# Altium PCB uMultimeter_ExpDigiPower_Pcb.PcbDoc
Units mil, origin at the board's own origin, x right, y up, seen from the top; angles counter-clockwise.
Board outline 950 x 1560 mil, 2 copper layers (Top Layer, Bottom Layer); 17 components, 21 nets, 66 pads, 10 vias.
Unrouted connection lines stored in the file: 2.
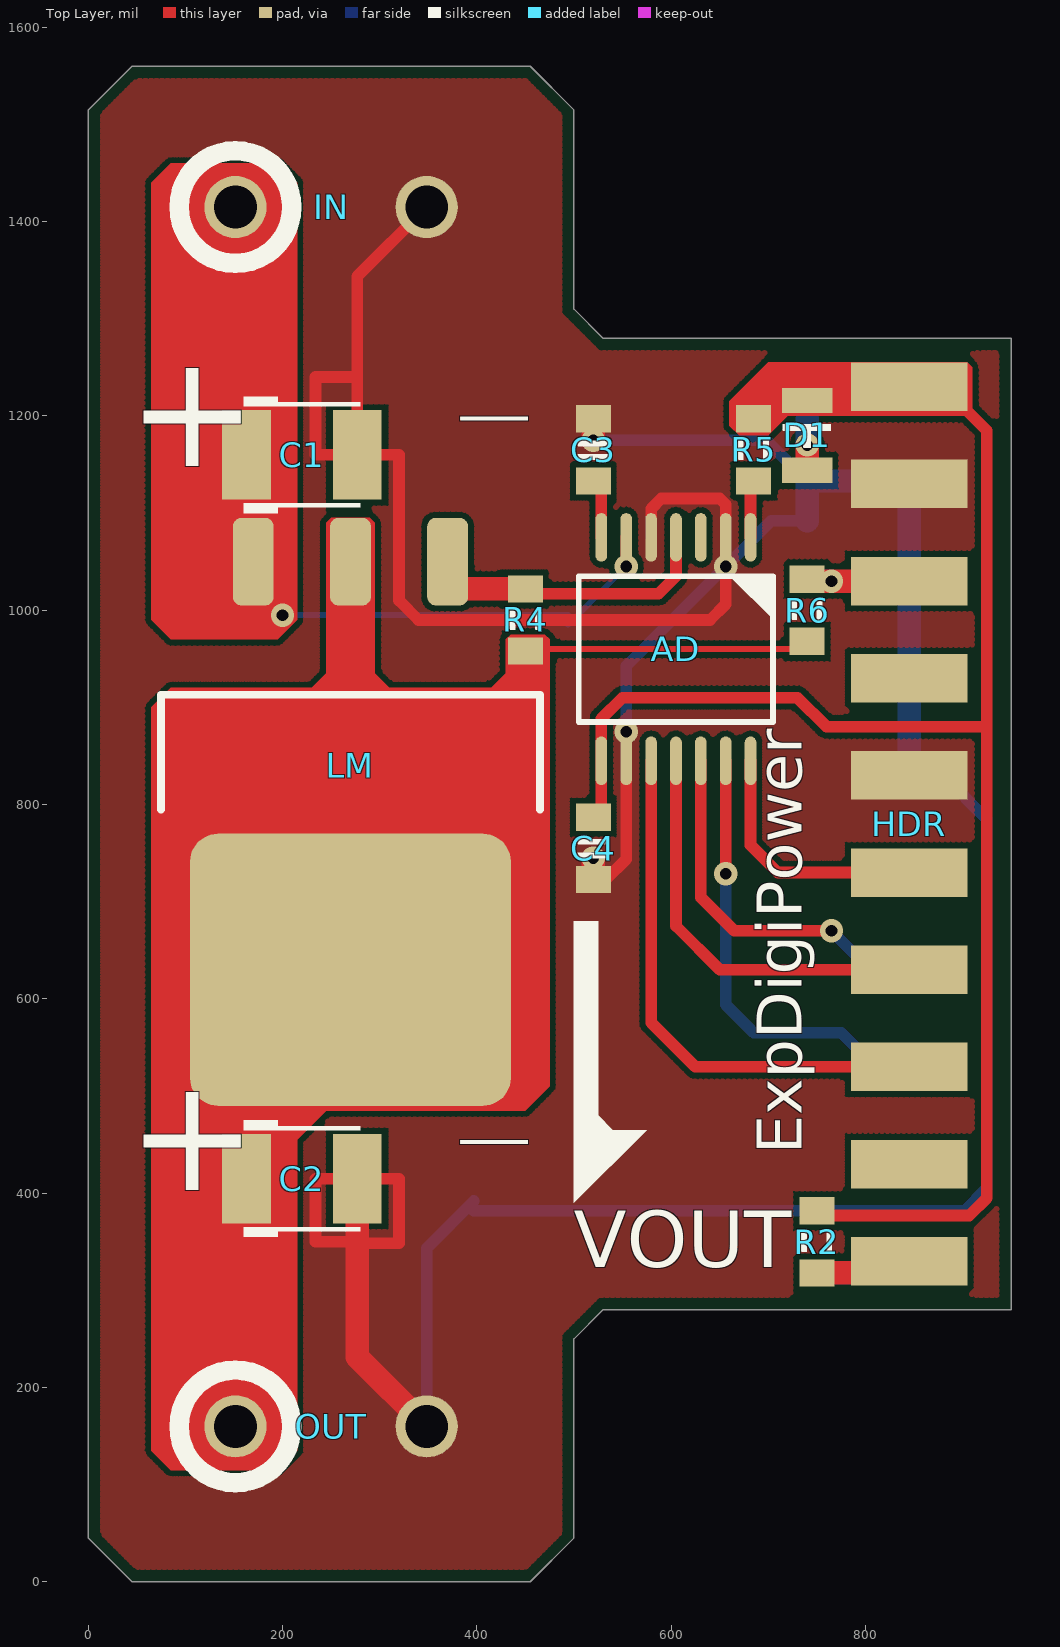
[diagram p0: Top Layer view]
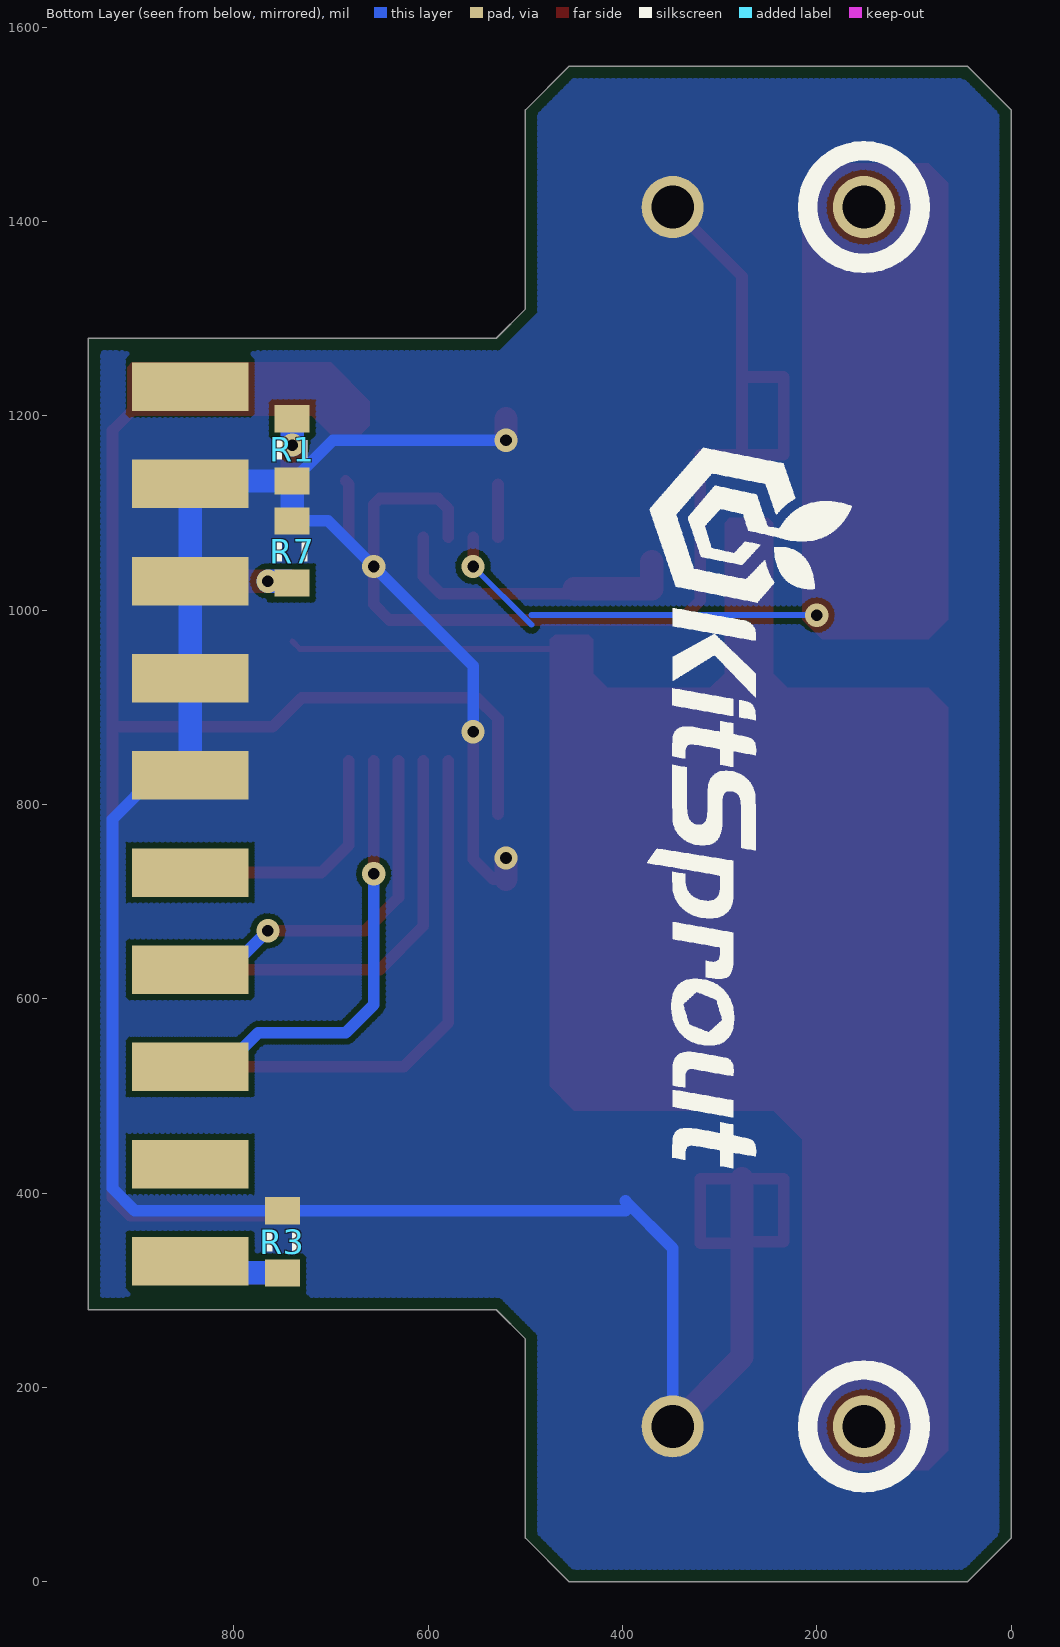
[diagram p1: Bottom Layer view, seen from below]
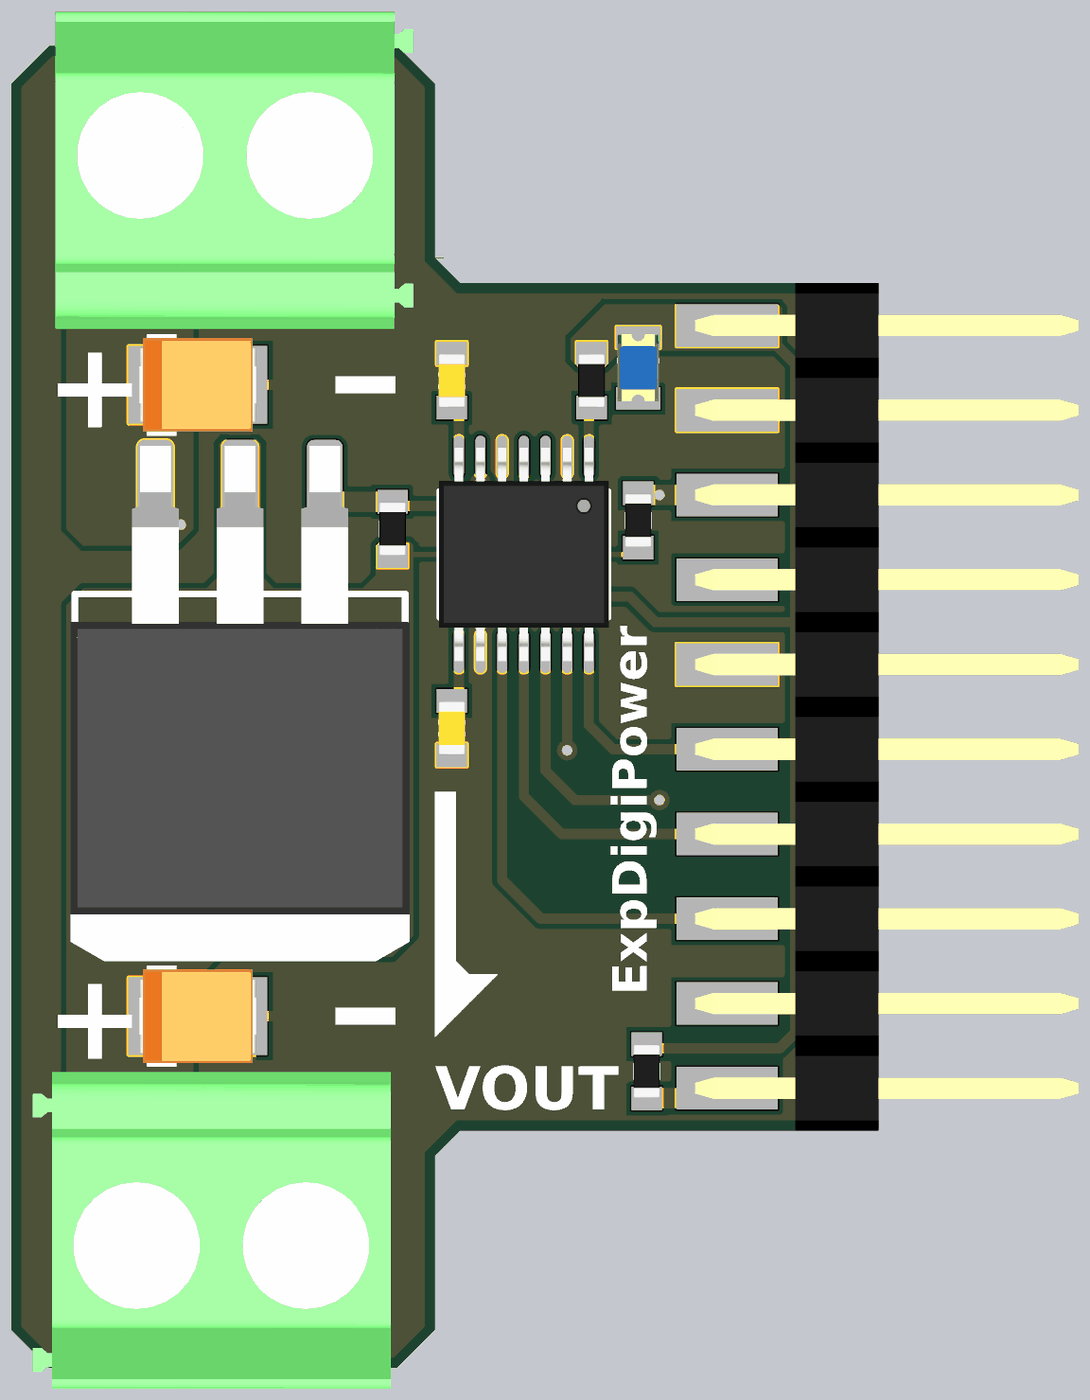
[diagram p2: 3D render of the assembled board from above, using the file's embedded part models]
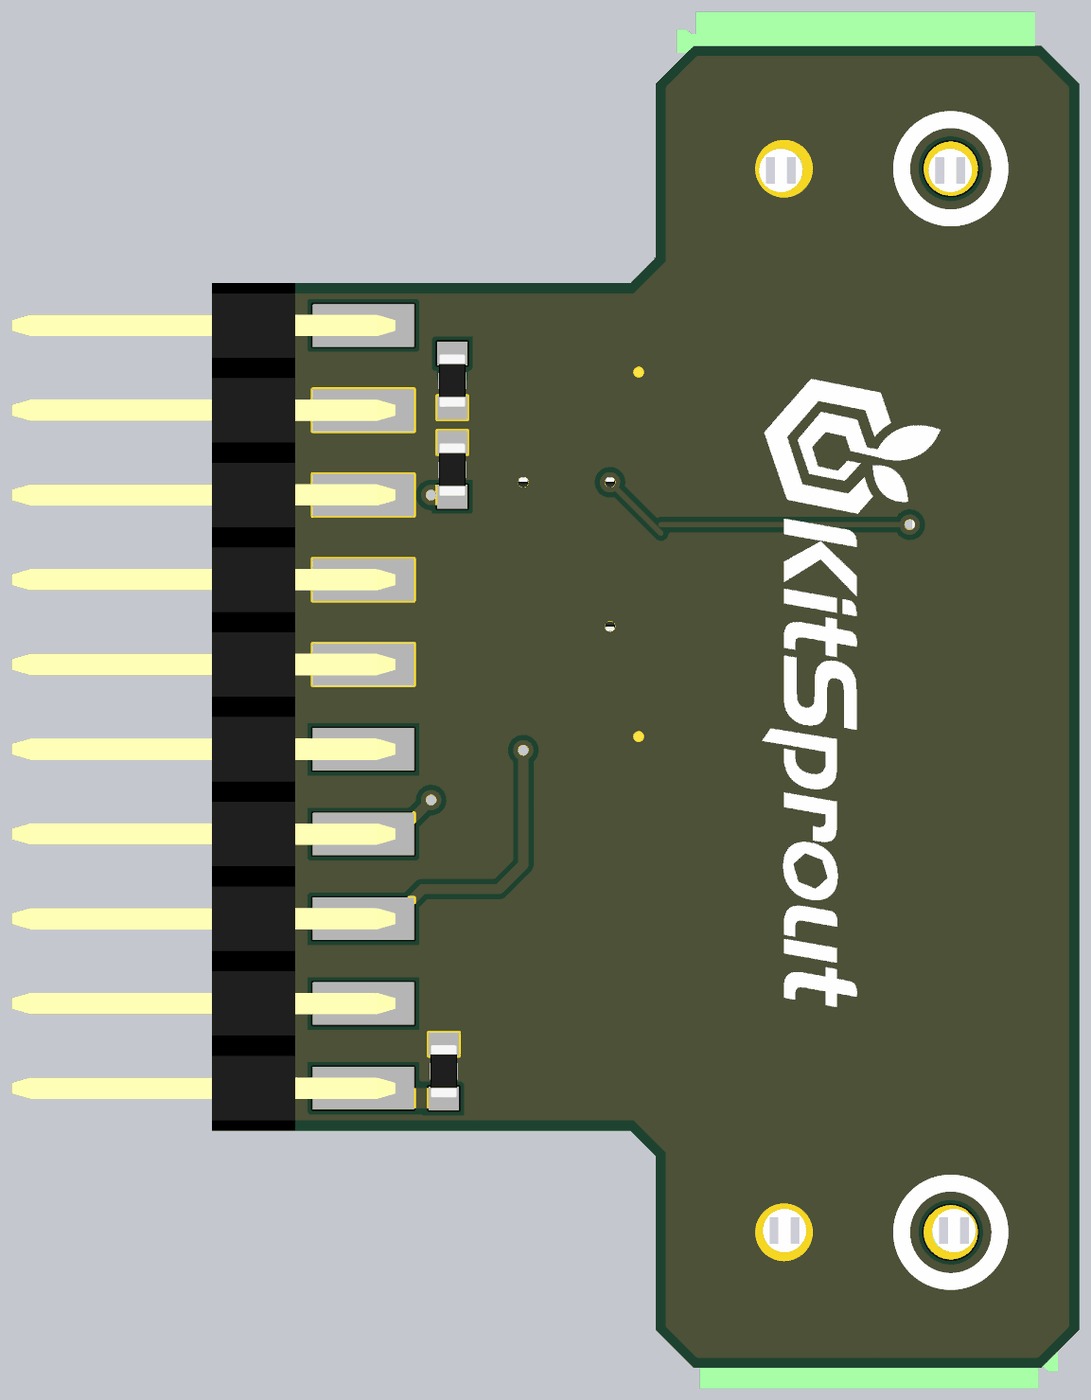
[diagram p3: 3D render of the assembled board from below, using the file's embedded part models]

## Layer stack, top to bottom
Top Solder: solder mask 0.4, Solder Resist, Dk 3.5
Top Layer: signal copper 1.4
Dielectric1: dielectric 12.6, FR-4, Dk 4.8
Bottom Layer: signal copper 1.4
Bottom Solder: solder mask 0.4, Solder Resist, Dk 3.5

## Board outline
0,45 45,0 455,0 500,45 500,250 530,280 950,280 950,1280 530,1280 500,1310 500,1515 455,1560 45,1560 0,1515

## Design rules (kind name [scope] priority, off if disabled: settings)
Clearance ClearancePolygon [InPolygon] p1: gap=6
Clearance [All] p2: gap=6
ComponentClearance [All] p1: gap=0 collisioncheckmode=3 verticalgap=0 showdistances=FALSE
Height [All] p1: minheight=0 maxheight=5000 prefheight=500
HoleSize [All] p1: absolutevalues=TRUE maxlimit=200 minlimit=1 maxpercent=80.000 minpercent=20.000
HoleToHoleClearance [All] p1: gap=6 allowstackedmicrovias=TRUE
MinimumSolderMaskSliver [All] p1: minsoldermaskwidth=4
PlaneConnect [All] p1: planeconnectstyle=Direct reliefexpansion=20 reliefentries=4 reliefconductorwidth=20 reliefairgap=10
PolygonConnect [All] p1: connectstyle=Direct reliefconductorwidth=20 reliefentries=4 polygonreliefangle="90 Angle" airgapwidth=10
RoutingVias [All] p1: holewidth=12 width=20 viastyle="Through Hole" minholewidth=12 minwidth=20 maxholewidth=100 maxwidth=200
SilkToSilkClearance [All] p1: silktosilkclearance=0
SilkToSolderMaskClearance SilkscreenOverComponentPads [IsPad] p1: minsilkscreentomaskgap=1 clearancetoexposedcopper=TRUE
SolderMaskExpansion [All] p1: expansion=2
Width [All] p1: maxlimit=64 minlimit=6 preferedwidth=10
22 further rules are at their usual default settings.

## Classes and differential pairs
component class uMultimeter_ExpDigiPower_Sch: AD C1 C2 C3 C4 D1 IN LM OUT R1 R2 R3 R4 R5 R6 R7
component class EXP: HDR

## Components (designator, comment, footprint, x,y, rotation, side; value= is the part's Value field where it differs from the comment)
AD "AD5292" TSSOP_E170_P0.65_14 605,960 r270 top
C1 "Cap_Tan_1210" CAP_TAN_B1210 220,1160 r0 top
C2 "Cap_Tan_1210" CAP_TAN_B1210 220,415 r0 top
C3 "Cap_0603" CAP_0603 520,1165 r270 top
C4 "Cap_0603" CAP_0603 520,755 r90 top
D1 "LED_0805" LED_0805_BLUE 740,1180 r270 top
HDR "HDR2x10_2.54" HDR2X10_2.54_180H 845,1230 r0 top
IN "2Way_5" 2Way_5 250,1415 r180 top
LM "LM1084" TO-263-3 270,795 r180 top
OUT "2Way_5" 2Way_5 250,160 r0 top
R1 "Res_0603" RES_0603 740,1165 r270 bottom
R2 "Res_0603" RES_0603 750,350 r270 top
R3 "Res_0603" RES_0603 750,350 r90 bottom
R4 "Res_0603" RES_0603 450,990 r270 top
R5 "Res_0603" RES_0603 685,1165 r90 top
R6 "Res_0603" RES_0603 740,1000 r270 top
R7 "Res_0603" RES_0603 740,1060 r270 bottom

## Footprints (in the part's own frame and the unit in brackets; to place one, negate y for a bottom-side part, rotate by r counter-clockwise, add the part's x,y. Pads: shape width x height; smd on the part's side, far side on the other; paste and mask are expansions set on the pad)
2Way_5 [mil]
  round 64 hole 44: 1(-98.43,0) 2(98.43,0)
  body extent -225,-185 198,189, height 591
CAP_0603 [mil]
  rect 28x36 smd: 1(-32,0) 2(32,0)
  silkscreen extent -10,-16 10,16, body extent -31,-16 32,16, height 36
CAP_TAN_B1210 [mil]
  rect 50x92 smd: 1(-57,0) 2(57,0)
  silkscreen extent -60,-60 60,60, body extent -69,-55 69,55, height 83
HDR2X10_2.54_180H [mil]
  rect 120x50 smd: 1(0,0) 3(0,-100) 5(0,-200) 7(0,-300) 9(0,-400) 11(0,-500) 13(0,-600) 15(0,-700) 17(0,-800) 19(0,-900)
  rect 120x50 smd far side: 2(0,0) 4(0,-100) 6(0,-200) 8(0,-300) 10(0,-400) 12(0,-500) 14(0,-600) 16(0,-700) 18(0,-800) 20(0,-900)
  body extent -38,-950 415,50, height 100
LED_0805_BLUE [mil]
  rect 26x52 smd: 1(-36,0) 2(36,0)
  silkscreen extent -12,-25 12,24, body extent -40,-25 40,25, height 43
RES_0603 [mil]
  rect 28x36 smd: 1(-32,0) 2(32,0)
  silkscreen extent -10,-16 10,16, body extent -31,-16 32,16, height 20
TO-263-3 [mil]
  rrect40% 42x90 smd: 1(-100,-255) 2(0,-255) 3(100,-255)
  rrect20% 330x280 smd: 4(0,165)
  silkscreen extent -195,-118 195,0, body extent -200,-293 200,315, height 185
TSSOP_E170_P0.65_14 [mil]
  oval 50x12 smd: 1(-115,76.77) 2(-115,51.18) 3(-115,25.59) 4(-115,0) 5(-115,-25.59) 6(-115,-51.18) 7(-115,-76.77) 8(115,-76.77) 9(115,-51.18) 10(115,-25.59) 11(115,0) 12(115,25.59) 13(115,51.18) 14(115,76.77)
  silkscreen extent -75,-100 75,100, body extent -126,-100 126,100, height 47

## Part data
AD: "Digital Pot"
C1 C2 C3 C4: "Capacitor"
D1: "LED"
HDR: "Header"
IN OUT: "DB"
LM: "Power"
R1 R2 R3 R4 R5 R6 R7: "Resistor"

## Via types
v1: diameter 24, hole 12, Top Layer to Bottom Layer, 10 vias

## Nets (pads, with @x,y where several pads share a name; then routed paths per layer and width w, separated by ;. In a path a pad name is that pad's centre, name@x,y a point inside that pad or via, vN(x,y) a via of type N, cw(c..) or ccw(c..) an arc to the next point about the centre after c; other vN are vias at no path point)
3V3: AD.8 C4.2 D1.1 HDR.1 HDR.2 R2.1 R5.2 | length 1587.3
  Top Layer w12: C4.2@528.23,790.23 AD.8 528.23,888.23 550,910 730,910 760,880 925,880 ; R2.1@750,377 907,377 925,395 925,880 ; HDR.1 880,1230 925,1185 925,880
DIN: AD.10 HDR.15 | length 553.9
  Top Layer w12: AD.10 579.41,575.59 625,530 HDR.15
EXP_ID1: HDR.20 R3.1 | length 100
  Bottom Layer w24: R3.1 833,318 HDR.20
EXP_ID2: HDR.19 R2.2 | length 100
  Top Layer w24: R2.2 833,318 HDR.19
GND: AD.2 AD.5 AD.9 C1.2 C2.2 C3.1 C4.1 HDR.3 HDR.4 HDR.6 HDR.8 HDR.9 HDR.10 IN.1 OUT.2 R1.2 R3.2 R7.1 | length 4318.6
  Top Layer w12: 277,348.46 320,348.46 320,415 C2.2 234,415 234,350 277,350 ; 277,1240 234,1240 234,1160 C1.2 ; IN.1 277,1343.57 C1.2 ; C4.1@525,723 533,723 553.82,743.82 v1(553.82,875) ; AD.5 579.41,1104.41 590,1115 650,1115 656.18,1108.82 AD.2 656.18,1006.18 640,990 340,990 320,1010 320,1160 C1.2
  Top Layer w24: C2.2 277,231.43 OUT.2 ; C4.1 v1(520,745) ; v1(520,1175) C3.1 ; HDR.3@805,1130 HDR.3
  Bottom Layer w12: OUT.2 348.43,343.43 397,392 ; 397,382 R3.2 902,382 925,405 925,785 880,830 HDR.10 ; v1(520,1175) 698,1175 R1.2 ; v1(553.82,875) 553.82,942.64 v1(656.18,1045) 703.18,1092 R7.1
  Bottom Layer w24: R7.1 R1.2 HDR.4@845,1133 ; HDR.10 HDR.8 HDR.6 HDR.4
NetAD_1: AD.1 R5.1 | length 59.3
  Top Layer w12: AD.1 681.77,1129.77 R5.1
NetAD_7: AD.7 C3.2 | length 54.8
  Top Layer w12: AD.7 C3.2@528.23,1129.77
NetD1_2: D1.2 R1.1 | length 53
  Top Layer w24: D1.2 v1(740,1170)
  Bottom Layer w24: v1(740,1170) R1.1
NetHDR_12: HDR.12
NetHDR_17: HDR.17
NetHDR_18: HDR.18
PROBE_CH1: HDR.5 R6.1 R7.2 | length 128
  Top Layer w24: R6.1@740,1030 HDR.5
  Bottom Layer w24: R7.2@742,1030 v1(765,1030)
PROBE_CH2: HDR.7
RA: AD.3
RDY: AD.14 HDR.11 | length 261.7
  Top Layer w12: AD.14 681.77,758.23 710,730 HDR.11
RW: AD.4 LM.1 R4.1 | length 320.5
  Top Layer w12: R4.1@440,1017 587,1017 605,1035 AD.4
  Top Layer w24: LM.1 370,1022 R4.1
SCK: AD.11 HDR.13 | length 428.6
  Top Layer w12: AD.11 605,675 650,630 HDR.13
SDO: AD.13 HDR.16 | length 466.4
  Top Layer w12: v1(656.18,728.82) AD.13
  Bottom Layer w12: v1(656.18,728.82) 656.18,593.82 685,565 775,565 810,530 HDR.16
SYNC: AD.12 HDR.14 | length 385.8
  Top Layer w12: AD.12 630.59,704.41 665,670 v1(765,670)
  Bottom Layer w12: v1(765,670) 805,630 HDR.14
VIN: AD.6 C1.1 IN.2 LM.3 | length 408.7
  Top Layer w12: v1(553.82,1045) AD.6
  Bottom Layer w6: v1(200,995) 493.82,995 ; 493.82,985 v1(553.82,1045)
VOUT: C2.1 LM.2 LM.4 OUT.1 R4.2 R6.2 | length 315.3
  Top Layer w6: R4.2@462,960 732,960 R6.2 ; R4.2 462,970 R4.2

## Polygon pours and split planes (outlines as drawn)
GND on Top Layer "Bottom Layer-No Net" (hatched 45Degree grid 4 track 6, remove dead copper, pour order 2): 450,1545 50,1545 15,1510 15,50 50,15 450,15 485,50 485,255 525,295 935,295 935,1265 525,1265 485,1305 485,1510
GND on Bottom Layer "Bottom Layer-No Net" (hatched 45Degree grid 4 track 6, remove dead copper, pour order 2): 450,1545 50,1545 15,1510 15,50 50,15 450,15 485,50 485,255 525,295 935,295 935,1265 525,1265 485,1305 485,1510

## Other copper
Top Layer:
  pour cut-out: 242,470 312,470 312,360 242,360
  pour cut-out: 242,1215 312,1215 312,1105 242,1105
  region net VOUT: 65,900 85,920 230,920 245,935 245,1090 250,1095 290,1095 295,1090 295,935 310,920 415,920 430,935 430,970 435,975 470,975 475,970 475,510 450,485 245,485 215,455 215,135 195,115 85,115 65,135
  region net VIN: 65,1440 85,1460 195,1460 215,1440 215,990 195,970 85,970 65,990
  region net 3V3: 910,1250 905,1255 785,1255 700,1255 660,1215 660,1190 670,1180 700,1180 720,1200 905,1200 910,1205

## Silkscreen, mask and mechanical layers (free items; w line width, h text height)
Top Overlay:
  circle w20: c151.57,1415 r58
  circle w20: c151.57,160 r58
  region: 500,680 500,390 575,465 540,465 525,480 525,680
  text "-" at 375,1120 h200
  text "-" at 403,1120 h200
  text "+" at 40,1110 h200
  text "ExpDigiPower" at 750,440 h80 r90
  text "-" at 375,375 h200
  text "-" at 403,375 h200
  text "+" at 40,365 h200
  text "VOUT" at 500,305 h100
Bottom Overlay:
  drawing of 3512 lines, arcs and shapes, not listed
Mechanical 1:
  the board outline again, w2
Drill Drawing:
  text ".Legend" at 1145,65 h60